# Altium PCB PCBV1.PcbDoc
Units mil, origin at the board's own origin, x right, y up, seen from the top; angles counter-clockwise.
Board outline 3450 x 3963.02 mil, 2 copper layers (Top Layer, Bottom Layer); 66 components, 77 nets, 230 pads, 37 vias.
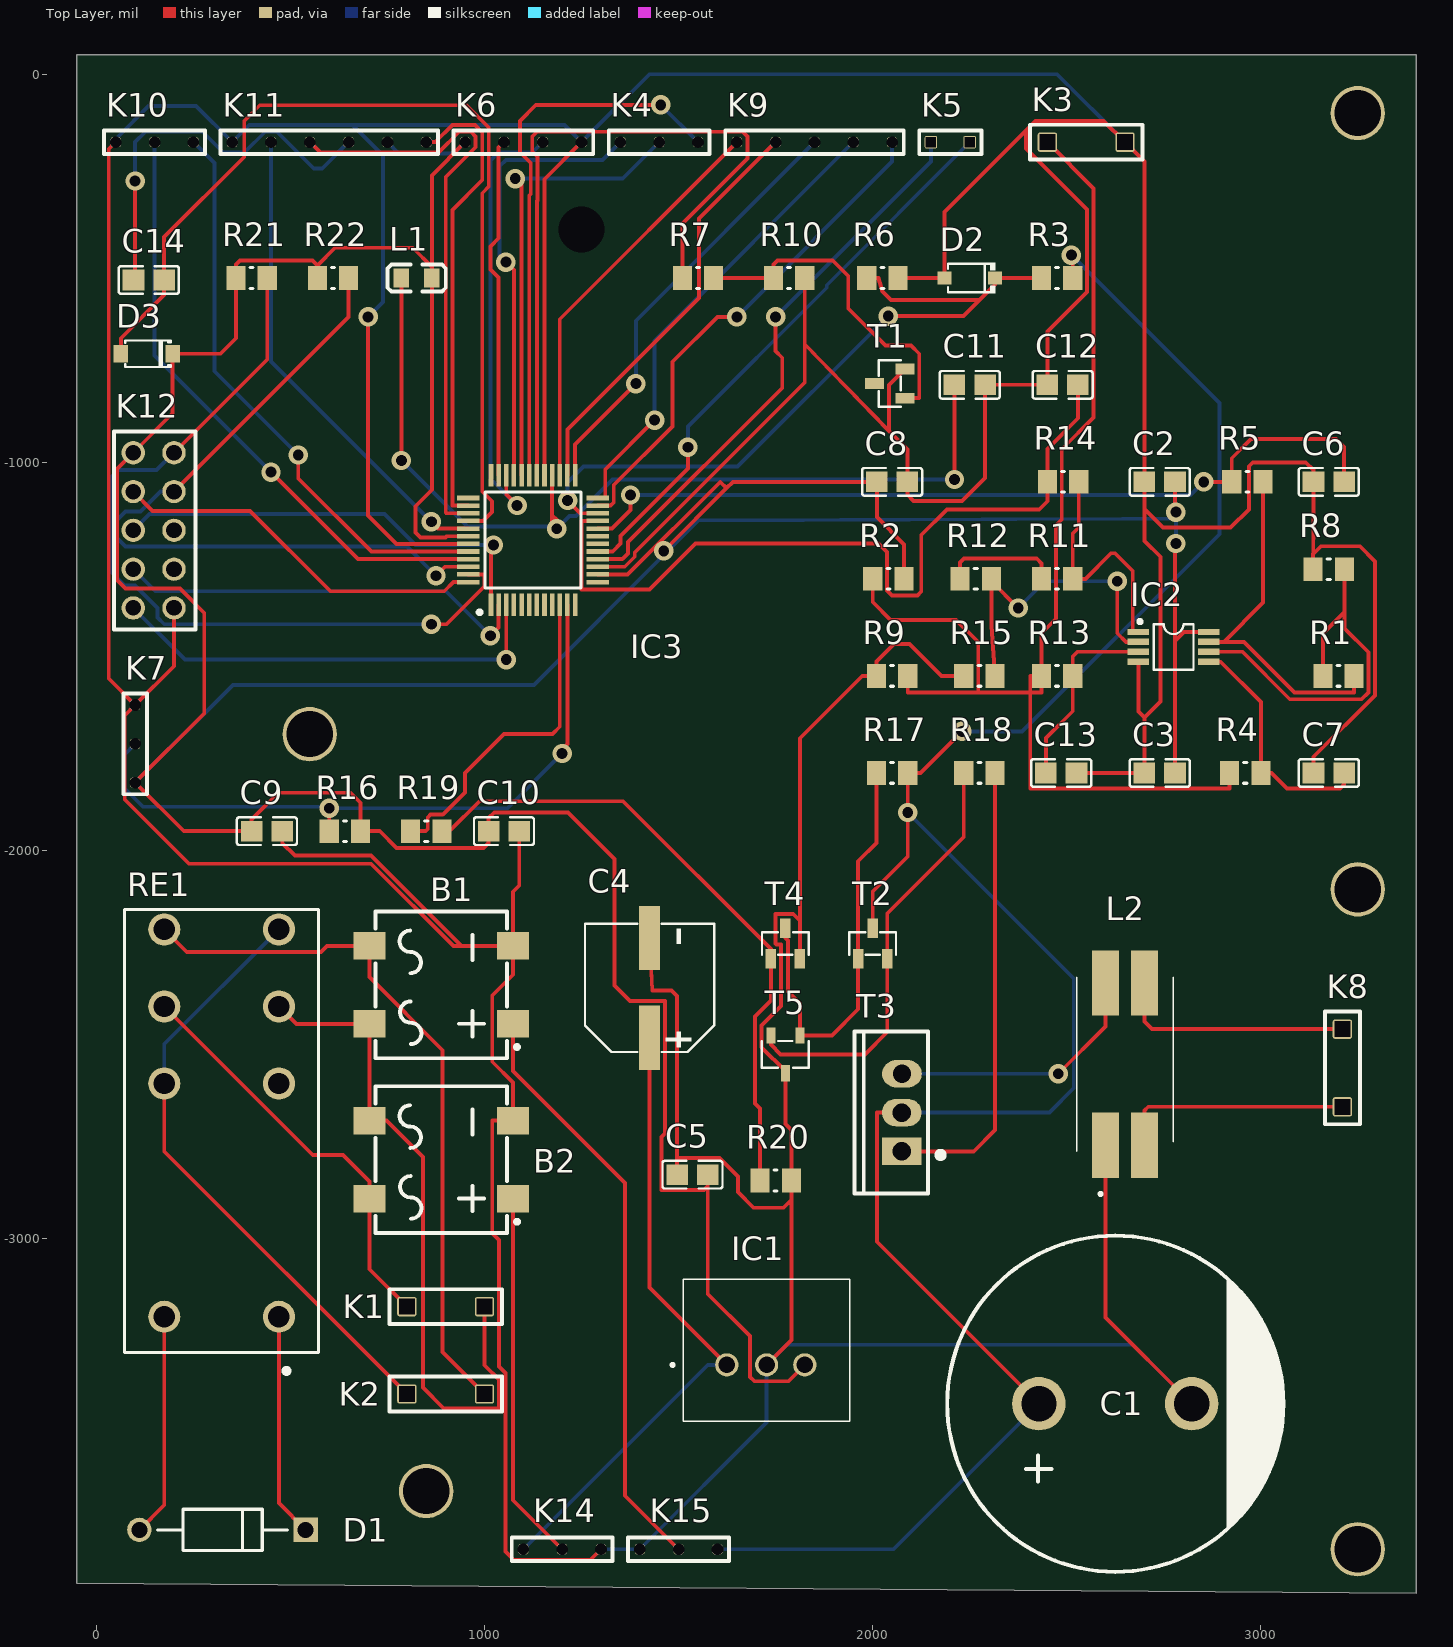
[diagram p0: Top Layer view]
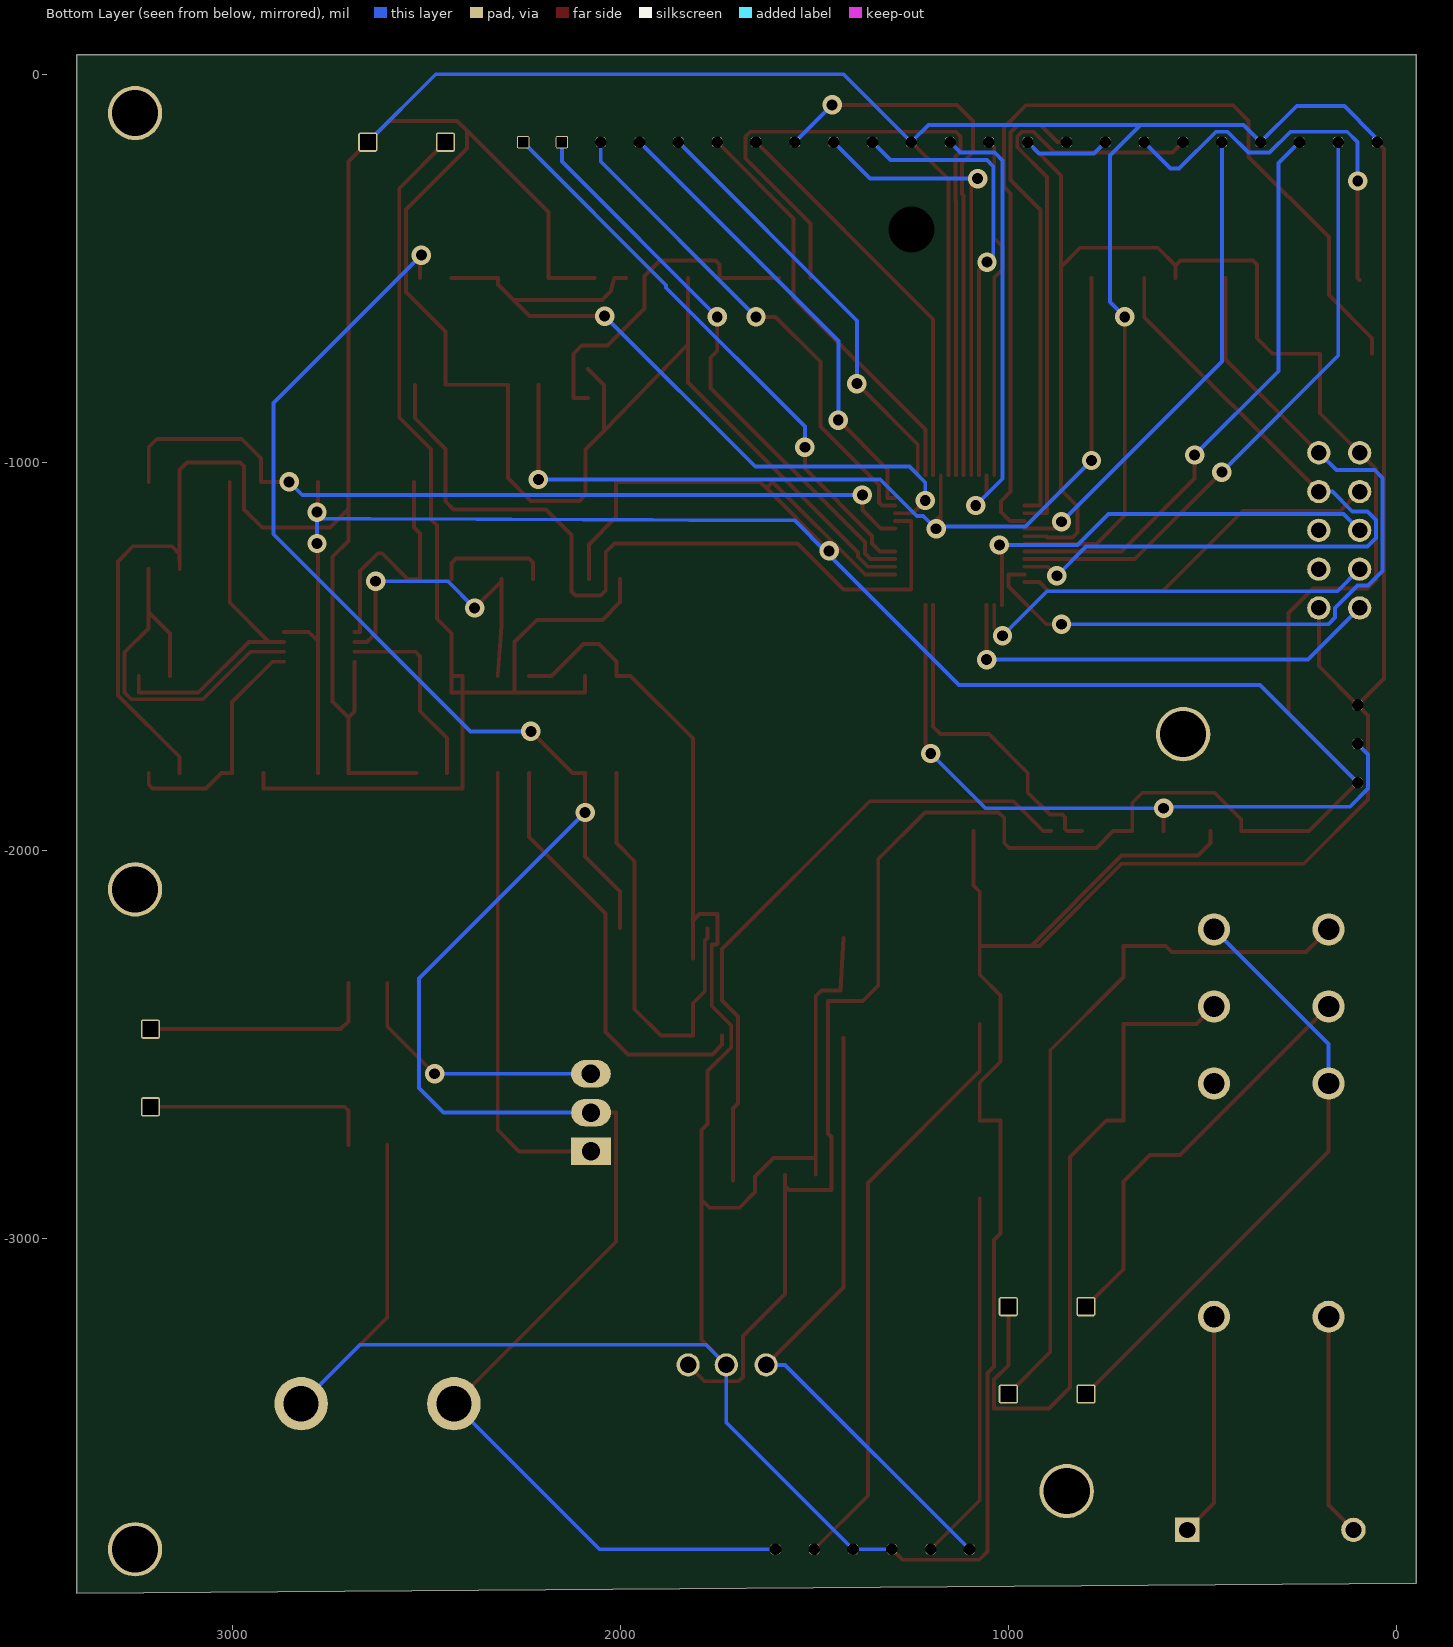
[diagram p1: Bottom Layer view, seen from below]

## Layer stack, top to bottom
Top Solder: solder mask 0.4, Solder Resist, Dk 3.5
Top Layer: signal copper 1.4
Dielectric 1: dielectric 12.6, FR-4, Dk 4.8
Bottom Layer: signal copper 1.4
Bottom Solder: solder mask 0.4, Solder Resist, Dk 3.5

## Board outline
-50,-3887.35 3400,-3913.02 3400,50 -50,50

## Design rules (kind name [scope] priority, off if disabled: settings)
Clearance [All] p1: gap=10 ignorepadtopadclearanceinfootprint=FALSE except(0: Arc-Hole Track-Hole SMDPad-Hole THPad-Hole Via-Hole Fill-Hole Poly-Hole Region-Hole Text-Hole; 7: Arc-Arc Arc-Track Arc-SMDPad Arc-THPad Track-Track Track-SMDPad Track-THPad SMDPad-SMDPad SMDPad-THPad)
PolygonConnect [All] p1: connectstyle=Relief reliefconductorwidth=10 reliefentries=4 polygonreliefangle="90 Angle" airgapwidth=10
RoutingVias [All] p1: holewidth=28 width=50 viastyle="Through Hole" minholewidth=28 minwidth=50 maxholewidth=28 maxwidth=50
SolderMaskExpansion [All] p1: expansion=4 istentingtop=FALSE
Width [All] p1: maxlimit=10 minlimit=10 preferedwidth=10
30 further rules are at their usual default settings.

## Classes and differential pairs
component class Voeding: B1 B2 C1 C4 C5 D1 D2 IC1 K1 K2 K14 K15 R3 R6 RE1
component class Thermokoppel: C6 C7 C12 C13 IC2 K3 R1 R2 R4 R5 R8 R9 R11 R12 R13 R14 R15
component class PWMSoldeerbout: K8 L2 R17 R18 R20 T2 T3 T4 T5
component class Microcontroller: C2 C3 C8 C9 C10 C11 C14 D3 IC3 K4 K5 K6 K7 K9 K10 K11 K12 L1 R7 R10 R16 R19 R21 R22 T1

## Components (designator, comment, footprint, x,y, rotation, side; value= is the part's Value field where it differs from the comment)
B1 "TTR8MF" "B1,2 Brug gelijkrichter" 900.29,-2350 r90 top
B2 "TTR8MF" "B1,2 Brug gelijkrichter" 900.29,-2800 r90 top
C1 "4700uF" "C1 4700uF" 2625.29,-3425 r0 top
C2 "10uF" "C2,5,10 10uF" 2739.66,-1050 r0 top
C3 "100nF" "C6,7,12,13 10nF" 2739.66,-1800 r0 top
C4 "100uF" "C4 100uF" 1425.29,-2353.63 r90 top
C5 "10uF" "C2,5,10 10uF" 1535.92,-2835 r0 top
C6 "10nF" "C6,7,12,13 10nF" 3175.29,-1050 r0 top
C7 "10nF" "C6,7,12,13 10nF" 3175.29,-1800 r0 top
C8 "100nF" "C6,7,12,13 10nF" 2050.29,-1050 r0 top
C9 "100nF" "C6,7,12,13 10nF" 439.66,-1950 r0 top
C10 "10uF" "C2,5,10 10uF" 1050.29,-1950 r180 top
C11 "100nF" "C6,7,12,13 10nF" 2250.29,-800 r0 top
C12 "10nF" "C6,7,12,13 10nF" 2489.66,-800 r0 top
C13 "10nF" "C6,7,12,13 10nF" 2485.92,-1800 r180 top
C14 "100nF" "C6,7,12,13 10nF" 135.29,-530 r0 top
D1 "1N4007" FP-1N4007-MFG 325.29,-3750 r180 top value=15pF
D2 "" "D2 zener diode" 2250.29,-525 r180 top
D3 "1N4148" "D3 1N14148" 130.29,-720 r180 top
IC1 "" "IC1 DC-DC converter" 1624.5,-3325 r0 top
IC2 "" "IC2 opamps" 2775.29,-1475 r270 top
IC3 "ATMEGA4809-AU" "IC3 ATMEGA4809-AU" 1125.29,-1200 r90 top
K1 "" Terminal_2 810.29,-3240 r0 top
K2 "" Terminal_2 990.29,-3335 r180 top
K3 "" Terminal_2 2460.29,-240 r0 top
K4 "" PInHeader_3 1360.29,-240 r0 top
K5 "" PInHeader_2 2160.29,-240 r0 top
K6 "" PInHeader_4 1240.29,-110 r180 top
K7 "" PInHeader_3 165.29,-1815 r90 top
K8 "" Terminal_2 3275.29,-2650 r90 top
K9 "" PInHeader_5 1660.29,-240 r0 top
K10 "" PInHeader_3 240.29,-110 r180 top
K11 "K PinHeaer_6" PInHeader_6 840.29,-110 r180 top
K12 "" BOxHeader_10 110.29,-1330 r90 top
K14 "" PInHeader_3 1110.29,-3865 r0 top
K15 "" PInHeader_3 1410.29,-3865 r0 top
L1 "10uH" "L2 SmoorSpoel" 825.29,-525 r0 top
L2 "" "L1 Smoorspoel" 2650.29,-2550 r0 top
R1 "18K" RESC2013X50X30ML20T20 3200.29,-1550 r0 top
R2 "1M" RESC2013X50X30ML20T20 2040.64,-1300 r0 top
R3 "68K" RESC2013X50X30ML20T20 2475.29,-525 r0 top
R4 "5K6" RESC2013X50X30ML20T20 2959.94,-1800 r180 top
R5 "5K6" RESC2013X50X30ML20T20 2965.64,-1050 r0 top
R6 "10K" RESC2013X50X30ML20T20 2025.29,-525 r180 top
R7 "10K" RESC2013X50X30ML20T20 1550.29,-525 r0 top
R8 "100" RESC2013X50X30ML20T20 3175.29,-1275 r0 top
R9 "10M" RESC2013X50X30ML20T20 2050.29,-1550 r0 top
R10 "4K7" RESC2013X50X30ML20T20 1784.94,-525 r0 top
R11 "18K" RESC2013X50X30ML20T20 2475.29,-1300 r0 top
R12 "18K" RESC2013X50X30ML20T20 2265.64,-1300 r0 top
R13 "5K6" RESC2013X50X30ML20T20 2475.29,-1550 r0 top
R14 "5K6" RESC2013X50X30ML20T20 2490.64,-1050 r0 top
R15 "100" RESC2013X50X30ML20T20 2275.29,-1550 r0 top
R16 "4K7" RESC2013X50X30ML20T20 640.64,-1950 r0 top
R17 "4K7" RESC2013X50X30ML20T20 2050.29,-1800 r0 top
R18 "100" RESC2013X50X30ML20T20 2275.29,-1800 r180 top
R19 "10K" RESC2013X50X30ML20T20 850.29,-1950 r0 top
R20 "4K7" RESC2013X50X30ML20T20 1750.29,-2850 r180 top
R21 "4K7" RESC2013X50X30ML20T20 400.29,-525 r0 top
R22 "4K7" RESC2013X50X30ML20T20 609.94,-525 r0 top
RE1 "" "RE1 Vermogen relais" 322.93,-3200.79 r90 top
T1 "BC847C" "T1,2,4 Bipolar Transistors" 2050.29,-800 r0 top
T2 "BC847" "T1,2,4 Bipolar Transistors" 1997.2,-2245.39 r270 top
T3 "IRF9Z34NPBF" "T3 MOSFET-P" 2075.48,-2675 r90 top
T4 "BC847" "T1,2,4 Bipolar Transistors" 1772.2,-2245.39 r270 top
T5 "BC857" "T5 Bipolar Transistors" 1775.29,-2525 r90 top

## Footprints (in the part's own frame and the unit in brackets; to place one, negate y for a bottom-side part, rotate by r counter-clockwise, add the part's x,y. Pads: shape width x height; smd on the part's side, far side on the other; paste and mask are expansions set on the pad)
"B1,2 Brug gelijkrichter" [mm]
  rect 1.8x2.1 smd: 1(-2.449,-4.411) 2(2.651,-4.411) 3(2.651,4.989) 4(-2.449,4.989)
  silkscreen extent -4.7,-4.79 4.9,4.59
BOxHeader_10 [mil]
  round 60 hole 40: 1(-45,-90) 2(-45,15) 3(55,-90) 4(55,15) 5(155,-90) 6(155,15) 7(255,-90) 8(255,15) 9(355,-90) 10(355,15)
  silkscreen extent -100,-145 410,65
"C1 4700uF" [mm] "CAP-TH_BD22.0-P10.00-D2.3-FD"
  round 3.5 hole 2.3: 1(-5,0) 2(5,0)
  silkscreen extent -11,-11 11,11
"C2,5,10 10uF" [mm] "C0805"
  rect 1.41x1.35 smd: 1(-1,0) 2(1,0)
  silkscreen extent -1.96,-0.9 1.96,0.9
"C4 100uF" [mm]
  rect 4.2x1.4 smd: 1(-3.267,0) 2(3.267,0)
  silkscreen extent -4.2,-4.23 4.2,4.23
"C6,7,12,13 10nF" [mm] "C0805"
  rect 1.41x1.35 smd: 1(-1,0) 2(1,0)
  silkscreen extent -1.96,-0.9 1.96,0.9
"D2 zener diode" [mm] "SOD-123_L2.7-W1.7-LS3.8-RD"
  rect 0.91x0.84 smd: 1(-1.655,0) 2(1.655,0)
  silkscreen extent -1.65,-1 1.43,1
"D3 1N14148" [mm] "SOD-123_L2.8-W1.8-LS3.7-RD"
  rect 0.95x1.15 smd: 1(-1.693,0) 2(1.693,0)
  silkscreen extent -1.58,-0.87 1.41,0.87
FP-1N4007-MFG [mm]
  rect 1.6x1.6 hole 1.05 paste-1000 mask+0: 1(-5.438,0)
  round 1.6 hole 1.05 paste-1000 mask+0: 2(5.438,0)
  silkscreen extent -4.24,-1.35 4.24,1.35, body extent -6.34,-1.45 6.34,1.45, height 0.25
"IC1 DC-DC converter" [mm] "OKI78SR515W36C"
  round 1.519 hole 1.08: 1(0,0) 2(2.6,0) 3(5.1,0)
  silkscreen extent -3.6,-3.7 8.05,5.6, body extent -10,-3.38 10,3.38, height 5.8
"IC2 opamps" [mil] "MSOP-8_L3.0-W3.0-P0.65-LS4.9-BL MCP6002-E/MS"
  rect 15.98x55 smd: 1(-38.39,-90.55) 2(-12.8,-90.55) 3(12.8,-90.55) 4(38.39,-90.55) 5(38.39,90.56) 6(12.8,90.56) 7(-12.8,90.55) 8(-38.39,90.55)
  silkscreen extent -70,-91 59,51
"IC3 ATMEGA4809-AU" [mm] "QFP50P900X900X120-48N"
  rect 1.475x0.3 smd: 1(-4.238,2.75) 2(-4.238,2.25) 3(-4.238,1.75) 4(-4.238,1.25) 5(-4.238,0.75) 6(-4.238,0.25) 7(-4.238,-0.25) 8(-4.238,-0.75) 9(-4.238,-1.25) 10(-4.238,-1.75) 11(-4.238,-2.25) 12(-4.238,-2.75) 25(4.238,-2.75) 26(4.238,-2.25) 27(4.238,-1.75) 28(4.238,-1.25) 29(4.238,-0.75) 30(4.238,-0.25) 31(4.238,0.25) 32(4.238,0.75) 33(4.238,1.25) 34(4.238,1.75) 35(4.238,2.25) 36(4.238,2.75)
  rect 0.3x1.475 smd: 13(-2.75,-4.238) 14(-2.25,-4.238) 15(-1.75,-4.238) 16(-1.25,-4.238) 17(-0.75,-4.238) 18(-0.25,-4.238) 19(0.25,-4.238) 20(0.75,-4.238) 21(1.25,-4.238) 22(1.75,-4.238) 23(2.25,-4.238) 24(2.75,-4.238) 37(2.75,4.238) 38(2.25,4.238) 39(1.75,4.238) 40(1.25,4.238) 41(0.75,4.238) 42(0.25,4.238) 43(-0.25,4.238) 44(-0.75,4.238) 45(-1.25,4.238) 46(-1.75,4.238) 47(-2.25,4.238) 48(-2.75,4.238)
  silkscreen extent -4.85,-3.15 3.15,3.62, body extent -10,-3.38 10,3.38, height 5.8
"L1 Smoorspoel" [mm]
  rect 1.78x4.27 smd: 1(-1.27,-5.305) 2(1.27,-5.305) 3(1.27,5.305) 4(-1.27,5.305)
  silkscreen extent -3.15,-8.6 3.15,5.69, body extent -10,-3.38 10,3.38, height 5.8
"L2 SmoorSpoel" [mm]
  rect 1x1.25 smd: 1(-1,0) 2(1,0)
  silkscreen extent -1.91,-0.89 1.91,0.89
PInHeader_2 [mil]
  rrect25% 32x32 hole 26 square: 1(-10,65) 2(90,65)
  silkscreen extent -40,35 120,95
PInHeader_3 [mil]
  rrect50% 26x26 hole 30: 1(-10,65) 2(90,65) 3(190,65)
  silkscreen extent -40,35 220,95
PInHeader_4 [mil]
  rrect50% 26x26 hole 30: 1(-10,65) 2(90,65) 3(190,65) 4(290,65)
  silkscreen extent -40,35 320,95
PInHeader_5 [mil]
  rrect50% 26x26 hole 30: 1(-10,65) 2(90,65) 3(190,65) 4(290,65) 5(390,65)
  silkscreen extent -40,35 420,95
PInHeader_6 [mil]
  rrect50% 26x26 hole 30: 1(-10,65) 2(90,65) 3(190,65) 4(290,65) 5(390,65) 6(490,65)
  silkscreen extent -40,35 520,95
"RE1 Vermogen relais" [mm] "RT42"
  round 2.1 hole 1.4: 1(0,-3.75) 2(15.26,-3.75) 3(20.3,-3.75) 4(25.34,-3.75) 5(25.34,3.75) 6(20.3,3.75) 7(15.26,3.75) 8(0,3.75)
  silkscreen extent -3.67,-6.35 26.65,6.35, body extent -10,-3.38 10,3.38, height 5.8
RESC2013X50X30ML20T20 [mm] "Chip Resistor, 2-Leads, Body 2.00x1.25mm, IPC Low Density"
  rect 1.25x1.55 smd: 1(-1.025,0) 2(1.025,0)
  silkscreen extent -0.1,-0.67 0.1,0.67, body extent -1.1,-0.72 1.1,0.72, height 0.5
"T1,2,4 Bipolar Transistors" [mm] "BC847C"
  rect 1.25x0.7 smd: 1(0.847,-0.872) 2(0.847,1.028) 3(-1.153,0.078)
  silkscreen extent -0.88,-1.45 0.57,1.6
"T3 MOSFET-P" [mm] "TO-220-3_L10.0-W4.5-P2.54-L"
  rect 1.8x2.6 hole 1.2: 1(-2.54,0.005)
  oval 1.8x2.6 hole 1.2: 2(0,0.005) 3(2.54,-0.005)
  silkscreen extent -5.3,-2.73 5.3,3.09
"T5 Bipolar Transistors" [mm] "SOT-23-3_L2.9-W1.6-P1.90-LS2.8-BR"
  rect 1.07x0.6 smd: 1(1.235,-0.95) 2(1.235,0.95) 3(-1.235,0)
  silkscreen extent -0.88,-1.54 0.88,1.54
Terminal_2 [mil]
  rrect25% 50x50 hole 40 square: 1(-10,65) 2(190,65)
  silkscreen extent -55,20 235,110

## Part data
B1 B2: library part "B1,2 Brug Gelijkrichter", BOM_JLCPCB Part Class="Extended Part", BOM_Manufacturer=MDD, BOM_Manufacturer Part=TTR8MF, BOM_Supplier=LCSC, BOM_Supplier Part=C712546, Contributor=LCSC, spicePre=D, spiceSymbolName=TTR8MF
C1: library part "C1 4700uF", BOM_JLCPCB Part Class="Extended Part", BOM_Manufacturer=CX(承兴), BOM_Manufacturer Part=KM478M050N35RR0VH2FP0, BOM_Supplier=LCSC, BOM_Supplier Part=C45662, nameAlias=Capacitance, spicePre=C, spiceSymbolName="4700uF 50V 22*35"
C2 C5 C10: library part "C2,5,10 10uF", BOM_JLCPCB Part Class="Basic Part", BOM_Manufacturer=muRata(村田), BOM_Manufacturer Part=GRM21BR61H106KE43L, BOM_Supplier=LCSC, BOM_Supplier Part=C440198, Contributor=LCSC, nameAlias=Capacitance, spicePre=C, spiceSymbolName=GRM21BR61H106KE43L
C3 C14: library part "C 100nF"
C4: library part "C4 100uF", BOM_JLCPCB Part Class="Extended Part", BOM_Manufacturer=Nichicon(尼吉康), BOM_Manufacturer Part=UWT1H101MNL1GS, BOM_Supplier=LCSC, BOM_Supplier Part=C445063, Contributor=LCSC, nameAlias=Capacitance, spicePre=C, spiceSymbolName=UWT1H101MNL1GS
C6 C7 C8 C9 C11 C12 C13: library part "C6,7,12,13 10nF", BOM_JLCPCB Part Class="Extended Part", BOM_Manufacturer=CCTC(三环), BOM_Manufacturer Part=TCC0805X7R103M500DT, BOM_Supplier=LCSC, BOM_Supplier Part=C376921, Contributor=LCSC, nameAlias=Capacitance, spicePre=C, spiceSymbolName=TCC0805X7R103M500DT
D1: library part zo_1N4007, "DIODE GEN PURP 1KV 1A DO204AL", Capacitance=15pF, Forward Current=1A, Manufacturer=Vishay, Manufacturer Part Number=1N4007-E3/54, Max Junction Temp=+150°C, Max Repetitive Reverse Voltage=1000V, Max Surge Forward Current=30A, Peak Reverse Current=30uA, Temperature="-50°C to +150°C", Temperature Range Low=-50°C, Automotive=No, Category=Diode, ComponentLink2Description=Datasheet, ComponentLink2URL=http://www.vishay.com/docs/88503/1n4001.pdf, Device Class L1="Discrete Semiconductors", Device Class L2=Diodes, Device Class L3="Rectifier Diodes", Digikey Description="DIODE GEN PURP 1KV 1A DO204AL", Height=2.7mm, Ipc Land Pattern Name=DIOPA1088W105L520D270, Lead Free=Yes, Mouser Description="Rectifiers Vr/1000V Io/1A", Octopart=https://octopart.com/1n4007-e3%2F54-vishay-39548207, Package=1N4007, RoHS=TRUE, Temperature Range High=+150°C
D2: library part "D2 zener diode", "BZT52C5V1_C1884555", BOM_JLCPCB Part Class="Extended Part", BOM_Manufacturer=YFW(佑风微), BOM_Manufacturer Part=BZT52C5V1, BOM_Supplier=LCSC, BOM_Supplier Part=C1884555, Contributor=LCSC, spicePre=D, spiceSymbolName=BZT52C5V1_C1884555
D3: library part "D3 1N14148", "1N4148W-C84367", BOM_JLCPCB Part Class="Extended Part", BOM_Manufacturer=MDD, BOM_Manufacturer Part=1N4148W, BOM_Supplier=LCSC, BOM_Supplier Part=C84367, spicePre=D, spiceSymbolName=1N4148W-C84367
IC1: library part "IC1 OKI-78SR-5_1.5-W36-C", "Non-Isolated DC/DC Converters 7.5W 24Vin 5Vout1 1.5A SIP Non-Iso", Manufacturer_Name="Murata Electronics", Manufacturer_Part_Number=OKI-78SR-5/1.5-W36-C, Mouser Part Number=580-OKI78SR5/1.5W36C, Datasheet Link=https://www.murata.com/products/productdata/8807037992990/oki-78sr.pdf?1583754815000, Geometry.Height=16.5mm, Mouser Price/Stock=https://www.mouser.co.uk/ProductDetail/Murata-Power-Solutions/OKI-78SR-5-1.5-W36-C?qs=uJpRT2lXVNXJP%252Bo08dQqJQ%3D%3D
IC2: library part "IC2 dual opamps", "IC2 dual opamps"
IC3: library part "IC3 ATMEGA4809-AU", "8-bit Microcontrollers - MCU 20MHz, 48KB, TQFP", Manufacturer_Name=Microchip, Mouser Part Number=556-ATMEGA4809-AU, Geometry.Height=1.2mm, Manufacturer_Part_Number=ATMEGA4809-AU, Mouser Price/Stock=https://www.mouser.co.uk/ProductDetail/Microchip-Technology-Atmel/ATMEGA4809-AU?qs=P1JMDcb91o4zLIorxO9tIg%3D%3D
K1 K2 K3 K8: library part "K Terminal_2"
K4 K7 K10 K14 K15: library part "K PinHeader_3"
K5: library part "K PinHeader_2"
K6: library part "K PinHeader_4"
K9: library part "K PinHeader_5"
K11: library part "K PinHeader_6"
K12: library part "K Boxheader_10"
L1: library part "L2 smoorspoel", BOM_JLCPCB Part Class="Extended Part", BOM_Manufacturer=KOHERelec(科或), BOM_Manufacturer Part=PMI201214S-100M, BOM_Supplier=LCSC, BOM_Supplier Part=C2922559, Contributor=LCSC, nameAlias=Inductance, spicePre=L, spiceSymbolName=PMI201214S-100M
L2: library part "L2 Common Mode Choke", "Common Mode Chokes / Filters 170ohms 100MHz 10A 1 Choke SMD", Manufacturer_Name="Laird Performance Materials", Manufacturer_Part_Number=CM2545X171R-10, Mouser Part Number=875-CM2545X171R-10, Datasheet Link=https://componentsearchengine.com/Datasheets/1/CM2545X171R-10.pdf, Geometry.Height=9.5mm, Mouser Price/Stock=https://www.mouser.co.uk/ProductDetail/Laird-Performance-Materials/CM2545X171R-10?qs=gHrF1kHvtHWa9UjYzLX7bQ%3D%3D
R1 R2 R3 R4 R5 R6 R7 R8 R9 R10 R11 R12 R13 R14 R15 R16 R17 R18 R19 R20 R21 R22: library part "R Resistor", Manufacturer="Vishay Dale", Part Number=CRCW08050000Z0EA
RE1: library part "RE1 Vermogen relais", "RT424005F  General Purpose Relays DPDT 8A 5VDC GEN PURPOSE RELAY", Manufacturer_Name="TE Connectivity", Manufacturer_Part_Number=RT424005F, Mouser Part Number=655-RT424005F, Datasheet Link=https://datasheet.datasheetarchive.com/originals/distributors/Datasheets_SAMA/2ef22a7a34dcc6453ddb52063c55ccaa.pdf, Mouser Price/Stock=https://www.mouser.co.uk/ProductDetail/TE-Connectivity-PB/RT424005F?qs=8wHch9UpSvaH%252B%252BmsSCbj0Q%3D%3D
T1: library part "T1,2,4 transisitors", "BC847C_C3027113", BOM_JLCPCB Part Class="Extended Part", BOM_Manufacturer=SALLTECH(萨瑞), BOM_Manufacturer Part=BC847C, BOM_Supplier=LCSC, BOM_Supplier Part=C3027113, Contributor=lcsc, link=https://atta.szlcsc.com/upload/public/pdf/source/20220824/287706FC7904CA05889B348536529CCD.pdf, spicePre=Q, spiceSymbolName=BC847C_C3027113
T2 T4: library part "T1,2,4 transisitors", "BC847C_C3027113", BOM_JLCPCB Part Class="Extended Part", BOM_Manufacturer=SALLTECH(萨瑞), BOM_Manufacturer Part=BC847C, BOM_Supplier=LCSC, BOM_Supplier Part=C3027113, Contributor=lcsc, link=https://atta.szlcsc.com/upload/public/pdf/source/20220824/287706FC7904CA05889B348536529CCD.pdf, spicePre=Q, spiceSymbolName=BC847C_C3027113
T3: library part "T3 MOSFET-P", BOM_JLCPCB Part Class="Extended Part", BOM_Manufacturer=Infineon(英飞凌), BOM_Manufacturer Part=IRF9Z34NPBF, BOM_Supplier=LCSC, BOM_Supplier Part=C500523, Contributor=LCSC, spicePre=Q, spiceSymbolName=IRF9Z34NPBF
T5: library part "T5 Bipolar Transistor", "BC857 3G", BOM_JLCPCB Part Class="Extended Part", BOM_Manufacturer=CJ(江苏长电/长晶), BOM_Manufacturer Part=BC857, BOM_Supplier=LCSC, BOM_Supplier Part=C2139, spicePre=Q, spiceSymbolName="BC857 3G"

## Free pads (board coordinates)
  round 140 hole 119: 4(550,-1700) 4(850,-3650) 4(3250,-3800) 4(3250,-2100) 4(3250,-100)
  round 60 hole 119: 4(1250,-400)

## Via types
v1: diameter 50, hole 28, Top Layer to Bottom Layer, 37 vias

## Nets (pads, with @x,y where several pads share a name; then routed paths per layer and width w, separated by ;. In a path a pad name is that pad's centre, name@x,y a point inside that pad or via, vN(x,y) a via of type N, cw(c..) or ccw(c..) an arc to the next point about the centre after c; other vN are vias at no path point)
+5: C2.2 C3.2 C5.2 C8.1 C9.1 C10.2 D3.1 IC1.3 IC2.8 IC3.14 IC3.42 K6.4 K7.1 K11.2 K12.10 L1.2 R2.2 R16.2 R21.1 R22.1 | length 12341.8
  Top Layer w10: R22.1 569.58,-492.71 ; K6.4 864.66,-260.63 864.66,-496.37 ; IC3.42 902.39,-1190.16 899.55,-1193 835.29,-1193 822.39,-1180.1 822.39,-1112.78 864.66,-1070.52 L1.2 864.66,-496.37 ; IC3.14 1368.95,-1288.58 1607.53,-1050 1623.71,-1066.18 ; v1(1461.9,-1228) 1623.71,-1066.18 ; C5.2 1575.29,-2864 ; IC1.3 1783.29,-3367 1695.29,-3367 1684.29,-3356 1684.29,-3251 1575.29,-3142 1575.29,-2864 ; R2.2 2081,-1211 2010.92,-1140.92 C8.1 1639.9,-1050 1623.71,-1066.18 ; C3.2 2779.03,-1460 ; C2.2 2779.03,-1125.74 v1(2781.29,-1128) ; v1(2781.29,-1209) 2779.03,-1211.26 2779.03,-1460 ; IC2.8 2802.42,-1436.61 2779.03,-1460 ; 569.58,-492.71 556.87,-480 369.94,-480 359.94,-490 R21.1 359.94,-680 319.94,-720 D3.1 196.92,-873.37 K12.10 53.29,-1017 53.29,-1303 75.29,-1325 215.29,-1325 278.29,-1388 278.29,-1647 K7.1 225.29,-1950 C9.1 400.29,-1920 469.29,-1851 655.29,-1851 681,-1876.71 R16.2 730.29,-1950 773.29,-1993 997.92,-1993 1010.92,-1980 C10.2 1010.92,-1916.37 1025.29,-1902 1215.29,-1902 1335.29,-2022 1335.29,-2347.58 1375.29,-2387.58 1464.85,-2387.58 1465.29,-2388.02 1465.29,-2729 1456.29,-2738 1456.29,-2874 1565.29,-2874 1575.29,-2864 ; 569.58,-492.71 615.29,-447 815.29,-447 864.66,-496.37
  Bottom Layer w10: K7.1 352.29,-1573 1127.29,-1573 v1@1467.09,-1233.2 ; K11.2 779.29,-204 921.29,-204 K6.4 ; v1(1461.9,-1228) v1@1467.09,-1233.2 ; v1(2781.29,-1209) v1(2781.29,-1128) 2764.29,-1145 2644.29,-1145 1550.29,-1150 v1@1467.09,-1233.2
GND: B1.2 B2.2 C1.2 C2.1 C3.1 C4.2 C5.1 C6.1 C7.1 C8.2 C9.2 C10.1 C11.2 C12.1 C13.1 D2.2 IC1.2 IC2.4 IC3.15 IC3.29 IC3.43 K3.2 K6.1 K7.3 K10.3 K11.6 K12.1 K14.3 K15.1 L2.1 R6.1 R8.1 R9.1 R10.2 R15.1 R20.1 T1.2 T4.2 T5.3 | length 24936.1
  Top Layer w10: K10.3 32.29,-193 32.29,-1557 K7.3 ; K12.1 200.29,-1525 K7.3 ; C9.2 479.03,-1980 512.03,-2013 708.29,-2013 940.92,-2245.63 ; v1(700.29,-625) 700.29,-1137 773.29,-1210 914.13,-1210 914.29,-1209.84 IC3.43 ; C10.1 1089.66,-2090.29 1073.95,-2106 B1.2 ; IC3.29 1154.82,-270.47 K6.1 ; IC3.15 1361.39,-1268.9 1387.29,-1243 1387.29,-1232 1825.29,-794 1825.29,-695.63 ; K14.3 1273.29,-3827 1075.29,-3827 1054.29,-3806 1054.29,-3346 1037.29,-3329 1037.29,-3003 1020.29,-2986 1020.29,-2695.63 B2.2 1073.95,-2597.66 1020.29,-2544 1020.29,-2373.66 1073.95,-2320 B1.2 ; C4.2 1432.33,-2360.04 1481.85,-2360.04 1496.55,-2374.74 1496.55,-2792 ; C5.1 1496.55,-2792 ; IC1.2 1790.64,-3261.22 1790.64,-2900 ; T4.2 1812.69,-2180 ; R10.2 1825.29,-695.63 ; R6.1 D2.2 2185.13,-355 2395.29,-144.84 ; T1.2 2042.29,-800.85 2042.29,-919 ; R15.1 2177.29,-1550 2094.64,-1467.35 2055.29,-1467.35 2009.94,-1512.71 R9.1 1973.29,-1550 1812.69,-1710.6 1812.69,-2180 ; C13.1 C3.1 2700.29,-1657 ; L2.1 2600.29,-3203.15 C1.2 ; IC2.4 2684.74,-1641.45 2700.29,-1657 ; C7.1 3135.92,-1758.33 3294.25,-1600 3294.25,-1254.96 3255.29,-1216 3155.29,-1216 3135.28,-1236.01 ; K7.3 73.29,-1652 73.29,-1868 239.29,-2034 708.29,-2034 919.92,-2245.63 940.92,-2245.63 ; 940.92,-2245.63 B1.2 ; 1496.55,-2792 1605.29,-2792 1653.29,-2840 1653.29,-2880 1693.29,-2920 1770.64,-2920 1790.64,-2900 ; 1790.64,-2900 R20.1 1790.64,-2720 1775.29,-2704.65 T5.3 1775.29,-2568 1714.08,-2506.79 1714.08,-2450.21 1764.29,-2400 1764.29,-2242 1752.51,-2242 1749.51,-2239 1749.51,-2163 1795.69,-2163 1812.69,-2180 ; 1825.29,-695.63 2042.29,-919 ; 2042.29,-919 2089.66,-966.37 C8.2 2089.66,-1083.37 2105.29,-1099 2230.66,-1099 2289.66,-1040 C11.2 C12.1 2450.29,-663 2552.29,-561 2552.29,-348 2395.29,-191 2395.29,-144.84 ; 2395.29,-144.84 2420.13,-120 2595.29,-120 K3.2 2700.29,-225 C2.1 2700.29,-1120 ; 2700.29,-1657 2741.29,-1616 2741.29,-1243 2700.29,-1202 2700.29,-1120 ; 2700.29,-1120 2748.29,-1168 2922.29,-1168 2969.29,-1121 2969.29,-1010 2979.29,-1000 3115.92,-1000 3135.92,-1020 C6.1 3135.92,-1162.02 3135.28,-1236.01 ; 3135.28,-1236.01 R8.1 3134.94,-1236.35 3135.28,-1236.01
  Bottom Layer w10: K10.3 56.58,-168.71 56.58,-160 134.58,-82 257.29,-82 K11.6 394.29,-131 660.29,-131 ; v1(700.29,-625) 738.29,-587 738.29,-209 660.29,-131 ; K14.3 K15.1 1726.86,-3473.43 IC1.2 1778.86,-3273 2670.14,-3273 C1.2 ; K3.2 2475.29,0 1425.29,0 K6.1 1206.29,-131 660.29,-131
NetB1_1: B1.1 K15.2 | length 1530.2
  Top Layer w10: B1.1 1073.95,-2568 1362.29,-2856.34 1362.29,-3662 K15.2
NetB1_3: B1.3 K2.1 RE1.5 | length 1836.1
  Top Layer w10: RE1.5 233.14,-2261 579.29,-2261 594.66,-2245.63 B1.3 703.87,-2326 892.29,-2514.42 892.29,-3292 K2.1
NetB1_4: B1.4 B2.3 K1.2 RE1.3 | length 1766.9
  Top Layer w10: RE1.3 515.41,-2446.42 B1.4 B2.3 747.92,-2695.63 841.29,-2789 841.29,-3383 895.29,-3437 1037.29,-3437 1037.29,-3363 1000.29,-3326 K1.2
NetB2_1: B2.1 K14.2 | length 955.9
  Top Layer w10: B2.1 1073.95,-3673.66 K14.2
NetB2_4: B2.4 K1.1 RE1.6 | length 1077.8
  Top Layer w10: RE1.6 557.72,-2784 635.29,-2784 703.87,-2852.58 B2.4 703.87,-3078.58 K1.1
NetC4_1: C4.1 IC1.1 K14.1 | length 1646.2
  Top Layer w10: C4.1 1425.29,-3125.79 IC1.1
  Bottom Layer w10: K14.1 1575.29,-3325 IC1.1
NetC6_2: C6.2 IC3.20 R5.1 | length 2175.2
  Top Layer w10: IC3.20 1328.89,-1170.47 1376.29,-1123.07 v1(1376.29,-1084) ; v1(2853.29,-1050) R5.1 2925.29,-989.37 2975.29,-939.37 3194.03,-939.37 3214.66,-960 C6.2
  Bottom Layer w10: v1(1376.29,-1084) 2819.29,-1084 v1(2853.29,-1050)
NetC7_2: C7.2 IC2.5 R4.1 | length 625.2
  Top Layer w10: IC2.5 2896.26,-1513.39 3000.29,-1617.42 R4.1 3027.29,-1800 3067.29,-1840 3204.66,-1840 3214.66,-1830 C7.2
NetC11_1: C11.1 IC3.28 L1.1 | length 2463
  Top Layer w10: v1(785.92,-995) L1.1 ; v1(1186.5,-1171) 1174.29,-1158.79 1174.29,-1136.19 ; v1@1186.5,-1165 1186.5,-1148.4 1174.29,-1136.19 ; v1(2210.92,-1044) C11.1 ; 1174.29,-1136.19 IC3.28@1174.29,-1057.18 ; IC3.28@1174.29,-1057.18 1174.5,-1057.18 IC3.28 IC3.28@1174.29,-1057.18
  Bottom Layer w10: v1(785.92,-995) 955.92,-1165 v1@1186.5,-1165 ; v1(1186.5,-1171) 1219.5,-1138 1236.29,-1138 1330.29,-1044 v1(2210.92,-1044)
NetC12_2: C12.2 IC3.21 R14.1 | length 2099.2
  Top Layer w10: IC3.21 1250.29,-1150.79 1250.29,-1327 1425.29,-1327 1543.29,-1209 2015.29,-1209 2037.29,-1231 2037.29,-1330 2050.29,-1343 2115.29,-1343 2125.29,-1333 2125.29,-1187 2191.29,-1121 2429.29,-1121 2450.29,-1100 R14.1 2450.29,-965 2529.03,-886.26 C12.2
NetC13_2: C13.2 IC2.3 R13.2 | length 502.8
  Top Layer w10: C13.2 2446.55,-1710 2515.64,-1640.9 R13.2 2515.64,-1500 2527.84,-1487.8 IC2.3
NetC14_1: C14.1 K11.3 | length 1030.2
  Top Layer w10: C14.1 100.29,-525.63 v1(100.29,-275)
  Bottom Layer w10: v1(100.29,-275) 100.29,-175 127.29,-148 273.29,-148 327.29,-202 381.29,-202 435.29,-148 465.29,-148 560.29,-243 582.29,-243 K11.3
NetC14_2: C14.2 D3.2 IC3.40 | length 2480.3
  Top Layer w10: D3.2 63.66,-680 174.66,-568.99 C14.2 174.66,-419.63 381.29,-213 381.29,-120 421.29,-80 954.29,-80 1011.29,-137 1011.29,-289.48 994.29,-306.48 994.29,-1075 1019.29,-1100 1019.29,-1127.79 996.29,-1150.79 IC3.40
NetC17_1: 
NetC18_1: 
NetC19_1: 
NetD1_1: D1.1 RE1.1 | length 577.7
  Top Layer w10: RE1.1 470.57,-3681.18 D1.1
NetD1_2: D1.2 RE1.8 | length 575.8
  Top Layer w10: D1.2 175.29,-3685.91 RE1.8
NetD2_1: D2.1 IC3.22 R3.1 R6.2 | length 1912
  Top Layer w10: v1(1214.29,-1098) 1247.39,-1131.1 IC3.22 ; R6.2 2015.29,-525 2025.29,-560 2047.29,-582 2275.13,-582 ; v1(2040.29,-623) 2234.13,-623 2275.13,-582 ; R3.1 D2.1 2315.45,-541.69 2275.13,-582
  Bottom Layer w10: v1(1214.29,-1098) 1214.29,-1052 1255.29,-1011 1652.29,-1011 v1(2040.29,-623)
NetIC2_1: IC2.1 R11.2 R14.2 | length 628.5
  Top Layer w10: R14.2 2531,-1167.65 2515.64,-1183 R11.2 2548.29,-1300 2614.29,-1234 2624.29,-1234 2670.29,-1280 2670.29,-1436.61 IC2.1
NetIC2_2: IC2.2 R12.2 R15.2 | length 829.5
  Top Layer w10: R12.2 R12.2@2306,-1306 ; R15.2 2306,-1420.35 R12.2@2306,-1306 ; v1(2375.29,-1375) 2375.09,-1375 2306.09,-1306 R12.2@2306,-1306 ; v1(2630.29,-1306) 2630.29,-1440 2652.49,-1462.2 IC2.2
  Bottom Layer w10: v1(2375.29,-1375) 2444.29,-1306 v1(2630.29,-1306)
NetIC2_6: IC2.6 R1.1 R8.2 | length 1000.1
  Top Layer w10: IC2.6 2952.53,-1487.8 3074.73,-1610 3259.77,-1610 3277.25,-1592.51 3277.25,-1489 3215.64,-1427.39 3215.64,-1385.29 ; R1.1 3159.94,-1441 3215.64,-1385.29 ; R8.2 3215.64,-1385.29
NetIC2_7: IC2.7 R1.2 R5.2 | length 926
  Top Layer w10: IC2.7 2905.09,-1462.2 ; R5.2 3006,-1361.29 2905.09,-1462.2 ; R1.2 3240.64,-1593 3087.29,-1593 2956.49,-1462.2 2905.09,-1462.2
NetIC3_1: IC3.1 K12.6 | length 1135.1
  Top Layer w10: IC3.1 1017.02,-1219.05 v1(1023.29,-1212.78)
  Bottom Layer w10: K12.6 137.29,-1133 742.61,-1133 822.39,-1212.78 v1(1023.29,-1212.78)
NetIC3_2: IC3.2 K12.4 | length 1079.7
  Top Layer w10: v1(1015.29,-1446.63) 1036.71,-1425.21 IC3.2
  Bottom Layer w10: K12.4 152.29,-1332 900.66,-1332 v1(1015.29,-1446.63)
NetIC3_3: IC3.3 K12.2 | length 1157.3
  Top Layer w10: v1(1056.39,-1508) IC3.3
  Bottom Layer w10: K12.2 228.29,-1508 v1(1056.39,-1508)
NetIC3_10: IC3.10 R19.1 | length 856.5
  Top Layer w10: R19.1 848.18,-1950 854.04,-1944.14 854.04,-1914.52 861.07,-1907.49 892.8,-1907.49 950.29,-1850 950.29,-1800 1050.29,-1700 1175.29,-1700 1194.19,-1681.1 IC3.10
NetIC3_11: IC3.11 K7.2 R16.1 | length 1784.5
  Top Layer w10: R16.1 v1(600.29,-1891) ; v1(1200.29,-1750) 1200.29,-1739.18 1213.87,-1725.59 IC3.11
  Bottom Layer w10: K7.2 73.29,-1752 73.29,-1840 120.29,-1887 v1@600.29,-1887 ; v1(600.29,-1891) v1@600.29,-1887 ; v1(1200.29,-1750) 1059.29,-1891 604.29,-1891 v1@600.29,-1887
NetIC3_16: IC3.16 K5.1 | length 1480.7
  Top Layer w10: IC3.16 1355.24,-1249.21 1369.8,-1234.65 1369.8,-1205.49 1767.29,-808 1767.29,-730.41 1750.29,-713.41 v1(1750.29,-625)
  Bottom Layer w10: v1(1750.29,-625) 2150.29,-225 K5.1
NetIC3_17: IC3.17 K5.2 | length 1473.9
  Top Layer w10: IC3.17 1330.5,-1229.53 1351.03,-1209 1351.03,-1189.26 1524.29,-1016 v1(1524.29,-961)
  Bottom Layer w10: v1(1524.29,-961) 1524.29,-907.57 1881.79,-550.07 1881.79,-543.5 K5.2
NetIC3_23: IC3.23 K9.5 | length 1299.2
  Top Layer w10: IC3.23 1325.29,-1111.42 1333.29,-1103.42 1333.29,-1058.34 1484.51,-907.12 1484.51,-740.78 1600.29,-625 v1(1650.29,-625)
  Bottom Layer w10: v1(1650.29,-625) 2050.29,-225 K9.5
NetIC3_24: IC3.24 K9.4 | length 1200.6
  Top Layer w10: IC3.24 1311.29,-1091.73 1311.29,-1018 v1(1438.29,-891)
  Bottom Layer w10: v1(1438.29,-891) 1438.29,-687 K9.4
NetIC3_25: IC3.25 K9.3 | length 1113.6
  Top Layer w10: IC3.25 1233.56,-953.73 v1(1390.29,-797)
  Bottom Layer w10: v1(1390.29,-797) 1390.29,-635 K9.3
NetIC3_26: IC3.26 K9.2 | length 1080.3
  Top Layer w10: IC3.26 1213.87,-915.42 1553.29,-576 1553.29,-372 K9.2
NetIC3_27: IC3.27 K9.1 | length 1047.1
  Top Layer w10: IC3.27 1194.19,-631.1 K9.1
NetIC3_30: IC3.30 R7.1 | length 1877.3
  Top Layer w10: IC3.30 1135.13,-326.87 1136.29,-325.71 1136.29,-212 1123.29,-199 1123.29,-160 1135.29,-148 1665.29,-148 1677.29,-160 1677.29,-217 1509.94,-384.35 R7.1
NetIC3_31: IC3.31 K4.3 | length 1442.1
  Top Layer w10: IC3.31 1115.45,-312.56 1119.29,-308.71 1119.29,-229 1091.29,-201 1091.29,-120 1132.29,-79 v1(1454.29,-79)
  Bottom Layer w10: v1(1454.29,-79) K4.3
NetIC3_32: IC3.32 K4.2 | length 1180.9
  Top Layer w10: v1(1079.29,-269) 1095.76,-285.47 IC3.32
  Bottom Layer w10: v1(1079.29,-269) 1356.29,-269 K4.2
NetIC3_33: IC3.33 K4.1 | length 1148.1
  Top Layer w10: v1(1055.29,-484) 1076.08,-504.79 IC3.33
  Bottom Layer w10: v1(1055.29,-484) 1039.29,-468 1039.29,-237 1055.29,-221 1304.29,-221 K4.1
NetIC3_34: IC3.34 K6.2 | length 1161.5
  Top Layer w10: IC3.34 1056.39,-1083.1 v1(1084.29,-1111)
  Bottom Layer w10: v1(1084.29,-1111) 1015.29,-1042 1015.29,-222 1035.29,-202 1123.29,-202 K6.2
NetIC3_35: IC3.35 K6.3 | length 881.5
  Top Layer w10: IC3.35 1036.71,-524 1015.29,-502.58 1015.29,-444.04 1036.71,-422.62 1036.71,-188.58 K6.3
NetIC3_38: IC3.38 K11.1 | length 1204.6
  Top Layer w10: K11.1 873.29,-175 917.29,-131 975.29,-131 994.29,-150 994.29,-272.48 917.29,-349.48 917.29,-1111.42 IC3.38
NetIC3_39: IC3.39 K11.4 | length 1525.4
  Top Layer w10: K11.4 577.29,-202 881.29,-202 935.29,-148 965.29,-148 977.29,-160 977.29,-188 900.29,-265 900.29,-1129 902.39,-1131.1 IC3.39
NetIC3_41: IC3.41 K11.5 | length 1251.5
  Top Layer w10: v1(863.29,-1153) 880.76,-1170.47 IC3.41
  Bottom Layer w10: K11.5 450.29,-740 v1(863.29,-1153)
NetIC3_44: IC3.44 K10.1 | length 1494.1
  Top Layer w10: v1(520.29,-981) 520.29,-1041 708.82,-1229.53 IC3.44
  Bottom Layer w10: K10.1 304.29,-229 304.29,-765 v1(520.29,-981)
NetIC3_45: IC3.45 K10.2 | length 1575.3
  Top Layer w10: v1(450.29,-1025) 674.5,-1249.21 IC3.45
  Bottom Layer w10: K10.2 150.29,-725 v1(450.29,-1025)
NetIC3_46: IC3.46 K12.7 R22.2 | length 1915.5
  Top Layer w10: K12.7 650.29,-625 R22.2 ; v1(875.29,-1292) 898.39,-1268.9 IC3.46
  Bottom Layer w10: K12.7 165.29,-1075 114.29,-1126 75.29,-1126 53.29,-1148 53.29,-1195 75.29,-1217 800.29,-1217 v1(875.29,-1292)
NetIC3_47: IC3.47 K12.9 R21.2 | length 2127.7
  Top Layer w10: K12.9 440.64,-734.65 R21.2 ; v1(863.29,-1417) 902.48,-1417 999.48,-1320 999.48,-1288.58 IC3.47
  Bottom Layer w10: K12.9 155.29,-1020 56.29,-1020 36.29,-1040 36.29,-1280 73.29,-1317 100.29,-1317 158.29,-1375 158.29,-1400 175.29,-1417 v1(863.29,-1417)
NetIC3_48: IC3.48 K12.8 | length 979.4
  Top Layer w10: K12.8 145.29,-1125 396.29,-1125 603.29,-1332 896.56,-1332 920.29,-1308.27 IC3.48
NetIC4_2: 
NetIC4_3: 
NetIC4_4: 
NetIC4_5: 
NetIC4_6: 
NetIC4_7: 
NetIC4_8: 
NetIC4_9: 
NetIC4_12: 
NetIC4_13: 
NetIC4_14: 
NetIC4_15: 
NetIC4_19: 
NetIC4_20: 
NetK2_2: K2.2 RE1.4 RE1.7 | length 1578
  Top Layer w10: RE1.7 175.29,-2775 K2.2
  Bottom Layer w10: RE1.7 175.29,-2498.43 RE1.4
NetK3_1: K3.1 R2.1 R4.2 R9.2 R13.1 | length 3286.8
  Top Layer w10: R2.1 2000.29,-1360 2046.29,-1406 2215.29,-1406 2272.29,-1463 2272.29,-1593 ; R9.2 2090.64,-1593 2272.29,-1593 ; K3.1 2569.29,-294 2569.29,-884 2487.29,-966 2487.29,-1147 2472.29,-1162 2472.29,-1402.65 2434.94,-1440 R13.1 ; R4.2 2919.58,-1840 2406.29,-1840 2406.29,-1593 ; 2272.29,-1593 2406.29,-1593 ; 2406.29,-1593 2406.29,-1550 R13.1 ; 2406.29,-1593 2434.94,-1593 R13.1
NetK8_1: K8.1 L2.2 | length 603
  Top Layer w10: L2.2 2700.29,-2670 2710.29,-2660 K8.1
NetK8_2: K8.2 L2.3 | length 617.1
  Top Layer w10: L2.3 2700.29,-2440 2720.29,-2460 K8.2
NetL2_4: L2.4 T3.3 | length 687
  Top Layer w10: v1(2478.29,-2575) 2600.29,-2453 L2.4
  Bottom Layer w10: T3.3 v1(2478.29,-2575)
NetR7_2: R7.2 R10.1 T1.1 | length 867.8
  Top Layer w10: R7.2 R10.1 1744.58,-490 1754.58,-480 1897.29,-480 1937.29,-520 1937.29,-603 2033.29,-699 2099.29,-699 2120.29,-720 2120.29,-834.31 T1.1
NetR11_1: R11.1 R12.1 | length 300.8
  Top Layer w10: R12.1 2225.29,-1258 2235.29,-1248 2422.94,-1248 2434.94,-1260 R11.1
NetR17_1: R17.1 T2.1 T4.3 T5.1 | length 1098.3
  Top Layer w10: T4.3 1775.29,-2225.13 1782.29,-2232.13 1782.29,-2363 1812.69,-2393.4 T5.1 1895.29,-2476.38 1962.89,-2408.78 T2.1 1962.89,-2027.4 2009.94,-1980.35 R17.1
NetR18_1: R18.1 T3.1 | length 1183.1
  Top Layer w10: T3.1 2260.64,-2775 2315.64,-2720 R18.1
NetR18_2: R18.2 T2.2 T5.2 | length 1106.9
  Top Layer w10: T5.2 1737.89,-2500 1762.89,-2525 1980.29,-2525 2037.69,-2467.6 T2.2 2037.69,-2162.24 2234.94,-1965 R18.2
NetR19_2: R19.2 R20.2 T4.1 | length 1655.4
  Top Layer w10: R19.2 910.29,-1950 987.29,-1873 1357.28,-1873 1737.89,-2253.61 T4.1 1737.89,-2386.14 1697.08,-2426.95 1697.08,-2651.14 1709.94,-2664 R20.2
VIN: C1.1 K15.3 R3.2 R17.2 T2.3 T3.2 | length 5758.6
  Top Layer w10: T2.3 2000.29,-2105.35 2090.64,-2015 v1(2090.64,-1902) R17.2 2123.29,-1800 v1(2230.29,-1693) ; T3.2 2011.29,-2675 2011.29,-3007.85 C1.1 ; v1(2512.29,-466) 2515.64,-469.35 R3.2
  Bottom Layer w10: K15.3 2053.44,-3800 C1.1 ; T3.2 2455.29,-2675 2518.29,-2612 2518.29,-2329.65 v1(2090.64,-1902) ; v1(2230.29,-1693) 2385.42,-1693 2893.29,-1185.13 2893.29,-847 v1(2512.29,-466)
pads on no net: IC3.4 IC3.5 IC3.6 IC3.7 IC3.8 IC3.9 IC3.12 IC3.13 IC3.18 IC3.19 IC3.36 IC3.37 K12.3 K12.5 RE1.2 T1.3